# EAGLE board source_eagle (EAGLE 9.5.2)
REV: B
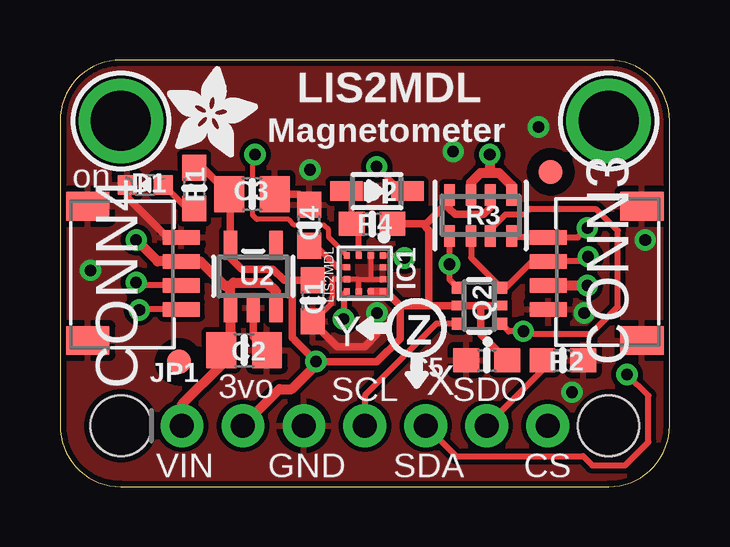
[diagram p0: board, top side]
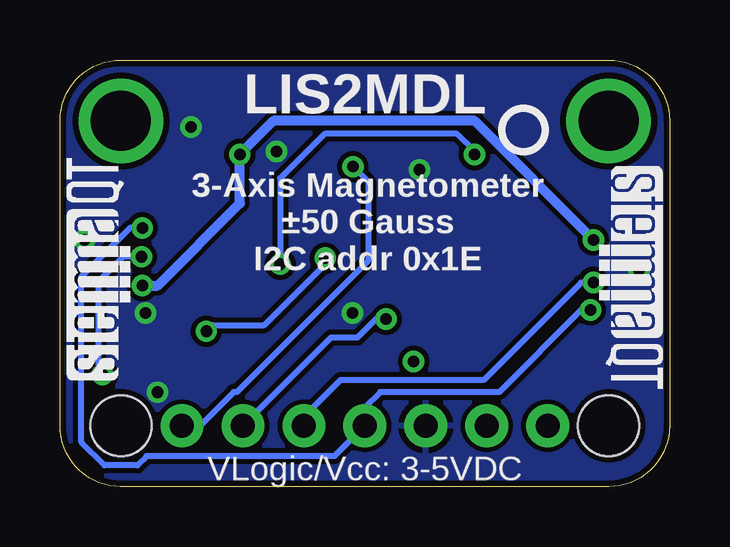
[diagram p1: board, bottom side, seen from below]

Size 25.4 x 17.78 mm. Coordinates in mm from the lower left corner, seen from the top.
Outline: 0,15.24 0,2.54 arc90 2.54,0 22.86,0 arc90 25.4,2.54 25.4,15.24 arc90 22.86,17.78 2.54,17.78 arc90 0,15.24
Copper layers (1*16): Top 0.035mm / dielectric 1.5mm / Bottom 0.035mm
Design rules "adafruit *": minimum track width 8mil, minimum drill 15.5mil, track to track 8mil, track to pad 8mil, pad to pad 8mil, via to via 8mil, smd to smd 8mil, copper to edge 10mil, drill to drill 8mil, minimum pad ring 10mil, minimum via ring 8mil, stop-mask expansion 2mil, vias tented up to drill 20mil, thermal gap 10mil
Net classes: 1 highpower: width 0.406 mm, drill 0.483 mm; 2 lowpower: width 0.305 mm, drill 0.483 mm
Holes 2.54 mm at 2.54,2.54 22.86,2.54

## Footprints (pad centres in the part's own frame; a part is rotated, then mirrored left to right if it is on the bottom)
0603-NO = smd 1.075 x 1: 1 -0.85,0; 2 0.85,0
0805-NO = smd 1.24 x 1.5: 1 -0.95,0; 2 0.95,0
JST_SH4 = smd 0.6 x 1.55: 1 -1.5,2.514; 2 -0.5,2.514; 3 0.5,2.514; 4 1.5,2.514 | smd 1.2 x 1.8: MT1 -2.8,-1.386; MT2 2.8,-1.386
CHIPLED_0603_NOOUTLINE = smd 0.8 x 0.8: A 0,-0.75; C 0,0.75
SOD-323 = smd 1.35 x 0.8: A 1.27,0; C -1.27,0
FIDUCIAL_1MM = smd 1 x 1: 1 0,0
LGA12_2X2MM = smd 0.275 x 0.25: 1 -0.75,0.75; 2 -0.75,0.25; 3 -0.75,-0.25; 4 -0.75,-0.75; 7 0.75,-0.75; 8 0.75,-0.25; 9 0.75,0.25; 10 0.75,0.75 | smd 0.25 x 0.275: 5 -0.25,-0.75; 6 0.25,-0.75; 11 0.25,0.75; 12 -0.25,0.75
1X07_ROUND_70 = drill 1 pad 1.778: 1 -7.62,0; 2 -5.08,0; 3 -2.54,0; 4 0,0; 5 2.54,0; 6 5.08,0; 7 7.62,0
SOT363 = smd 0.5 x 0.5: 1 -0.75,-0.9; 3 0.75,-0.9; 4 0.75,0.9; 6 -0.75,0.9 | smd 0.4 x 0.5: 2 0,-0.9; 5 0,0.9
RESPACK_4X0603 = smd 0.45 x 0.9: 1 -1.3,-0.85; 2 -0.4,-0.85; 3 0.4,-0.85; 4 1.3,-0.85; 5 1.3,0.85; 6 0.4,0.85; 7 -0.4,0.85; 8 -1.3,0.85
SOT23-5 = smd 0.55 x 1.2: 1 -0.95,-1.3; 2 0,-1.3; 3 0.95,-1.3; 4 0.95,1.3; 5 -0.95,1.3
MOUNTINGHOLE_2.5_PLATED = drill 2.5 pad 3.2: P$1 0,0

## Placement (x,y rotation side)
C1  0.1uF  [0603-NO]  10.54,7.75 270 top
C2  10uF  [0805-NO]  7.67,5.69 0 top
C3  10uF  [0805-NO]  8,12.19 0 top
C4  0.1uF  [0603-NO]  10.39,10.9 90 top
C5  1uF  [0603-NO]  17.78,5.27 180 top
CONN3  STEMMA_I2C_QT  [JST_SH4]  22.86,8.89 90 top
CONN4  STEMMA_I2C_QT  [JST_SH4]  2.54,8.89 270 top
D1  GREEN  [CHIPLED_0603_NOOUTLINE]  3.56,12.57 90 top
D2  1N4148  [SOD-323]  13.21,12.32 180 top
FID3  FIDUCIAL_1MM  [FIDUCIAL_1MM]  4.95,5.21 0 top
FID4  FIDUCIAL_1MM  [FIDUCIAL_1MM]  20.45,13.12 0 top
IC1  LIS2MDL  [LGA12_2X2MM]  12.7,8.89 270 top
JP1  [1X07_ROUND_70]  12.7,2.54 0 top
Q2  BSS138  [SOT363]  17.48,7.54 90 top
R1  10K  [0603-NO]  5.59,12.45 270 top
R2  10K  [0603-NO]  20.95,5.27 180 top
R3  10K  [RESPACK_4X0603]  17.53,11.3 180 top
R4  10K  [0603-NO]  13,10.95 0 top
U2  AP2112K-3.3  [SOT23-5]  8.05,8.76 0 top
U$1  MOUNTINGHOLE2.5  [MOUNTINGHOLE_2.5_PLATED]  2.54,15.24 0 top
U$11  [ADAFRUIT_3.5MM]  4.45,13.72 0 top
U$17  MOUNTINGHOLE2.5  [MOUNTINGHOLE_2.5_PLATED]  22.86,15.24 0 top
U$25  [PCBFEAT-REV-040]  6.1,14.86 0 bottom
U$30  [STEMMAQT]  22.48,4.45 90 bottom
U$31  [STEMMAQT]  2.92,13.34 270 bottom

## Library data of the parts
C1-C5 CONN3 CONN4 D1 D2 JP1 Q2 R1-R4 U2 U$11 U$25 = microbuilder
FID3 FID4 U$1 U$17 = microbuilder; BOM: EXCLUDE
IC1 = adafruit_sensor
U$30 U$31 = silks

## Nets
3.3V [lowpower]: C1.1 C3.1 C5.1 IC1.9 IC1.10 JP1.2 Q2.2 Q2.5 R1.1 R3.2 R3.4 R4.2 U2.5
CAP: C4.1 IC1.5
CS: D2.C JP1.7
CS_3V: D2.A IC1.3 R4.1
GND: C1.2 C2.2 C3.2 C4.2 C5.2 CONN3.1 CONN3.MT1 CONN3.MT2 CONN4.1 CONN4.MT1 CONN4.MT2 D1.C IC1.2 IC1.6 IC1.8 IC1.11 IC1.12 JP1.3 R2.1 U2.2
N$1: D1.A R1.2
SCL: CONN3.4 CONN4.4 JP1.4 Q2.6 R3.8
SCL_3V: IC1.1 Q2.1 R3.7
SDA: CONN3.3 CONN4.3 JP1.5 Q2.3 R3.6
SDA_3V: IC1.4 Q2.4 R3.5
SDO: IC1.7 JP1.6 R2.2
VCC [highpower]: C2.1 CONN3.2 CONN4.2 JP1.1 R3.1 R3.3 U2.1 U2.3

## Tracks (layer width: path | path; a pad name or v marks a point on that pad's centre or on a via)
3.3V  (via drill 0.48)
  Top 0.305: R1.1 5.95,13.3 C3.1 7.1,12.14 U2.5 7.1,9.54 7.57,9.07 8.87,9.07 9.34,8.6 9.53,8.6 | C1.1 9.53,8.6 | 17.53,7.54 Q2.5 15.37,7.54 | 17.53,7.54 Q2.2 | IC1.9 IC1.10 13.58,8.14 14.17,7.54 | 15.37,7.54 14.17,7.54 | R3.2 17.93,11.62 17.65,11.35 16.47,11.35 16.23,11.59 R3.4 16.23,11.91 15.27,10.95 15.11,10.95 | R4.2 15.11,10.95 | 15.11,10.95 15.37,10.69 15.37,7.54 | 9.53,8.6 9.69,8.44 9.69,6.21 9.78,6.12 9.78,6.1 10.67,5.21 | 14.17,7.54 14.17,6.17 13.21,5.21 10.67,5.21 | 17.53,7.54 17.53,6.35 18.61,5.27 C5.1 | 10.67,5.21 v10.67,5.22
  Top 0.406: JP1.2 9.14,4.06 9.65,4.06 10.67,5.08 10.67,5.21
CAP
  Top 0.254: IC1.5 11.56,9.14 10.65,10.05 C4.1
CS  (via drill 0.48)
  Top 0.254: D2.C 14.21,12.32 v13.2,13.34
  Bottom 0.254: v13.2,13.34 12.56,12.7 12.56,9.41 18.03,3.94 18.16,3.94 19.56,2.54 JP1.7
CS_3V
  Top 0.254: IC1.3 12.45,10.65 R4.1 12.15,12.1 D2.A
GND  (via drill 0.48)
  Top 0.203: C1.2 10.58,6.9 11.3,7.62 11.3,7.89 11.35,7.93 11.35,8.55 11.43,8.64 IC1.6 12.44,8.64 12.45,8.63 | IC1.8 12.45,8.63 | 12.45,8.63 12.46,8.64 12.95,8.64 | 12.95,8.64 IC1.11 | IC1.2 12.95,8.64
  Top 0.305: U2.2 8.05,6.26 C2.2 | C4.2 9.94,12.19 C3.2 | D1.C 2.81,12.05 4.47,10.39 CONN4.1 | C1.2 10.54,6.86 11.56,5.84 12.7,5.84 13.21,6.35 v13.21,7.24
  other vias: 10.41,13.21 21.84,7.24 24.38,10.29 19.94,14.99 1.27,9.02 21.34,3.94 16.38,13.97
  pour Top: 0,17.78 25.4,17.78 25.4,0 0,0
  pour Bottom: 0,17.78 25.4,17.78 25.4,0 0,0
N$1
  Top 0.254: D1.A 5.28,11.6 R1.2
SCL  (via drill 0.48)
  Top 0.254: R3.8 18.89,10.39 CONN3.4 21.58,10.39 v21.97,10.78 | CONN4.4 3.33,7.39 v3.3,7.37 | Q2.6 15.68,6.79 12.7,3.81 JP1.4
  Bottom 0.254: v3.3,7.37 3.67,7.37 7.1,3.94 12.06,3.94 12.7,3.3 JP1.4 13.97,1.27 21.8,1.27 22.18,0.89 23.54,0.89 24.51,1.86 24.51,8.75 22.48,10.78 v21.97,10.78
SCL_3V  (via drill 0.48)
  Top 0.254: Q2.1 18.69,6.48 v19.3,6.48 19.43,6.35 22.1,6.35 23.24,7.49 23.24,10.67 22.35,11.56 19.56,11.56 19.34,11.34 18.56,11.34 17.93,10.71 R3.7 | IC1.1 14.24,9.64 v14.35,9.53
  Bottom 0.254: v14.35,9.53 14.35,9.27 16.89,6.73 19.05,6.73 v19.3,6.48
SDA  (via drill 0.48)
  Top 0.254: R3.6 17.13,9.54 Q2.3 18.58,8.29 19.68,9.39 CONN3.3 21.82,9.39 v22.01,9.58 | CONN4.3 3.29,8.39 v3.17,8.51 | JP1.5 16.51,1.27 21.8,1.27 22.18,0.89 23.54,0.89 24.51,1.86 24.51,3.81 23.64,4.68 v23.62,4.68
  Bottom 0.254: v3.17,8.51 3.68,8.51 7.75,4.45 13.72,4.45 15.24,2.92 JP1.5 | v22.01,9.58 22.75,9.58 23.8,8.54 23.8,4.85 v23.62,4.68
SDA_3V  (via drill 0.48)
  Top 0.203: IC1.4 11.19,10.4 11.19,10.71 11,10.9 9.76,10.9 9.53,11.14 8.21,11.14 8.03,11.32 8.03,13.82
  Top 0.254: R3.5 v16.23,9.27 16.23,8.64 Q2.4 | v8.13,13.84 8.05,13.84 8.03,13.82
  Bottom 0.254: v8.13,13.84 8.13,13.97 8.87,14.71 14.38,14.71 16.23,12.86 v16.23,9.27
SDO  (via drill 0.48)
  Top 0.254: IC1.7 11.82,8.01 11.82,7.12 11.75,7.05 v11.81,6.99 | R2.2 20.11,4.87 JP1.6
  Bottom 0.254: v11.81,6.99 12.24,6.99 13.01,6.21 14.11,6.21 JP1.6
VCC  (via drill 0.48)
  Top 0.406: U2.3 9,8.14 8.64,8.51 7.24,8.51 7.1,8.37 | 7.1,8.37 U2.1 7.1,6.07 C2.1 6.72,5.07 5.08,3.43 JP1.1 | R3.3 17.13,12.68 17.53,13.08 17.91,13.08 | 17.91,13.08 18.29,13.08 18.83,12.54 R3.1 | CONN3.2 v21.96,8.39 v21.97,8.38 | v17.91,13.84 17.91,13.08 | 7.1,8.37 6.87,8.37 5.85,9.39 CONN4.2 4.07,9.39 v3.17,10.29
  Bottom 0.406: v21.97,8.38 21.34,8.38 17.91,11.81 v17.91,13.84 16.51,15.24 8.13,15.24 v3.17,10.29

## Text on the board
tPlace: LIS2MDL | Magnetometer | on | Z | Y | X | 3vo | SCL | SDO | VIN | GND | SDA | CS
bPlace: LIS2MDL | 3-Axis Magnetometer / ±50 Gauss / I2C addr 0x1E | VLogic/Vcc: 3-5VDC